# Altium PCB M1.PcbDoc
Units mil, origin at the board's own origin, x right, y up, seen from the top; angles counter-clockwise.
Board outline 3706.72 x 2266.13 mil, 2 copper layers (Top Layer, Bottom Layer); 8 components, 76 nets, 233 pads, 79 vias.
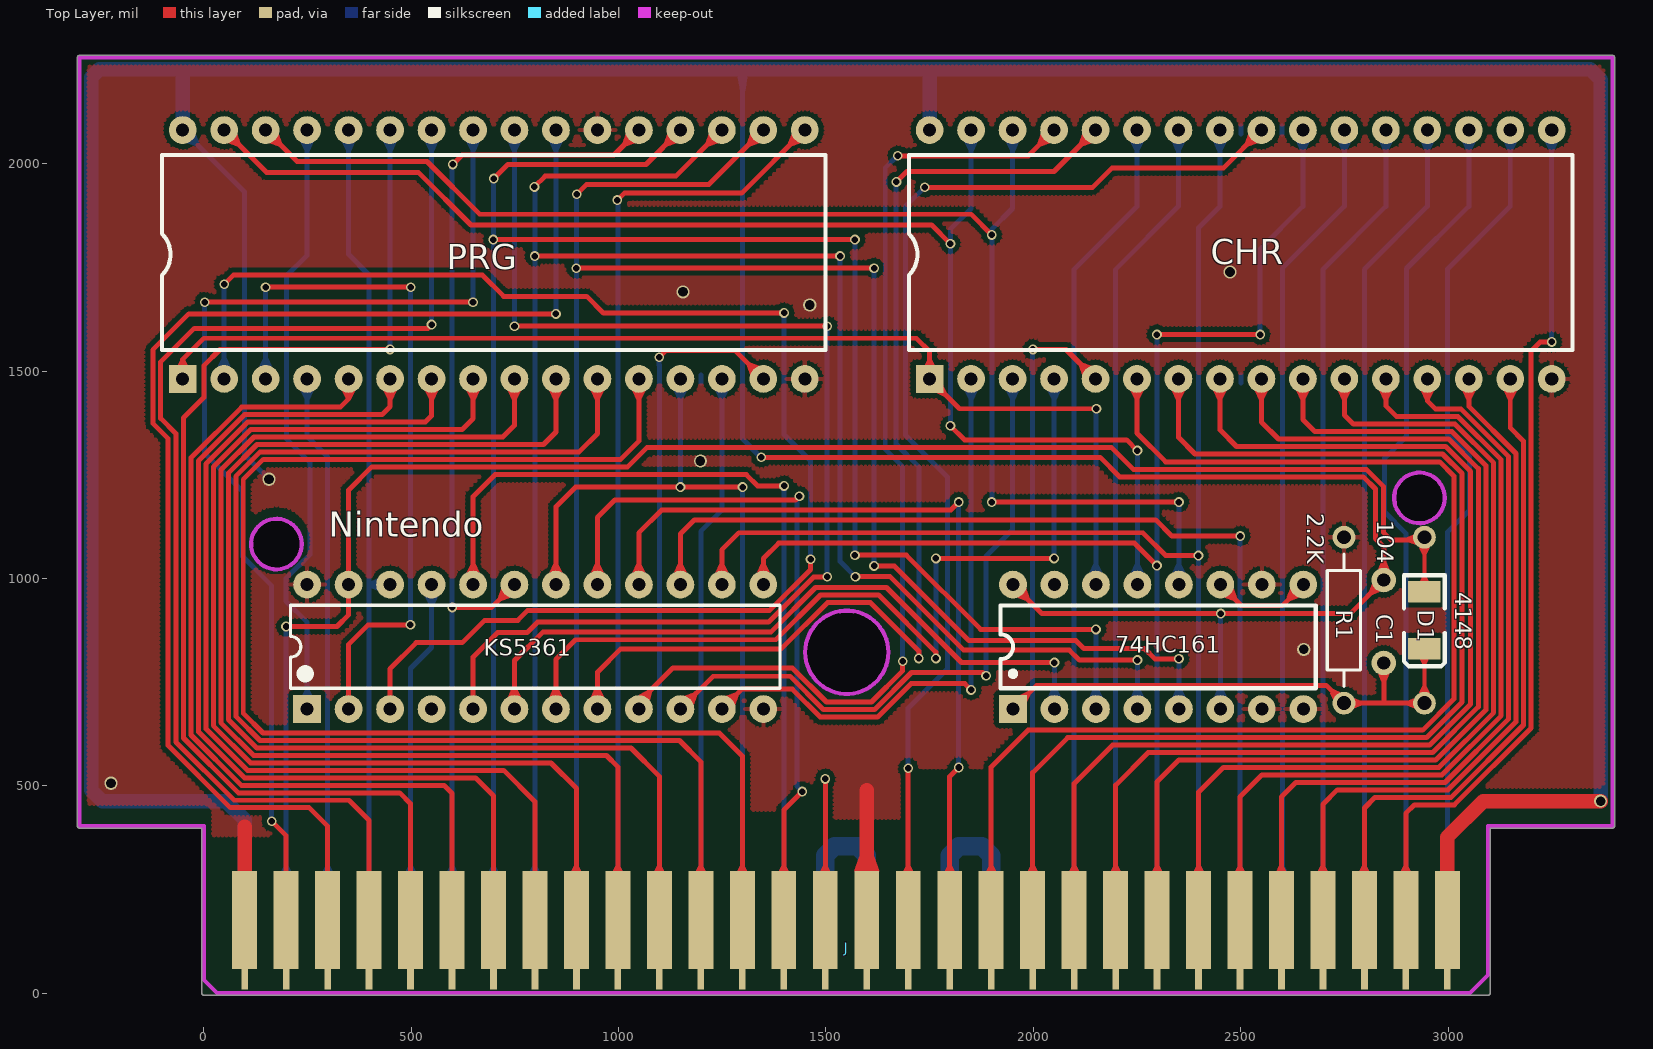
[diagram p0: Top Layer view]
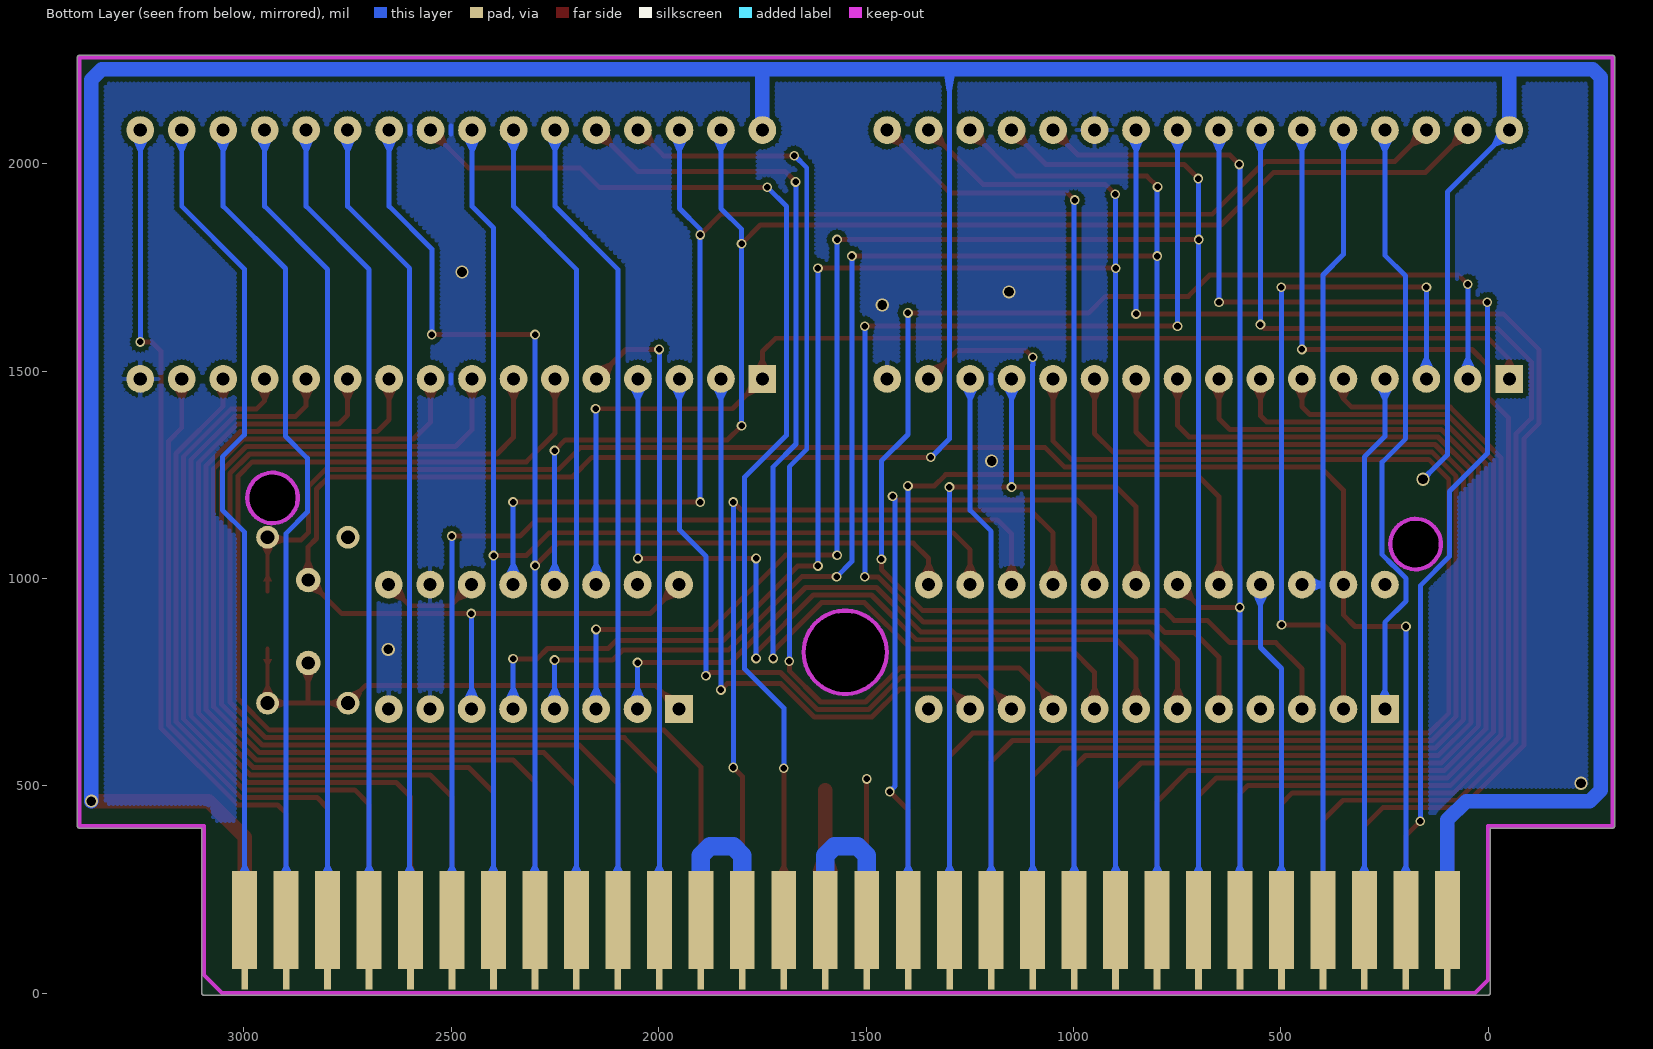
[diagram p1: Bottom Layer view, seen from below]
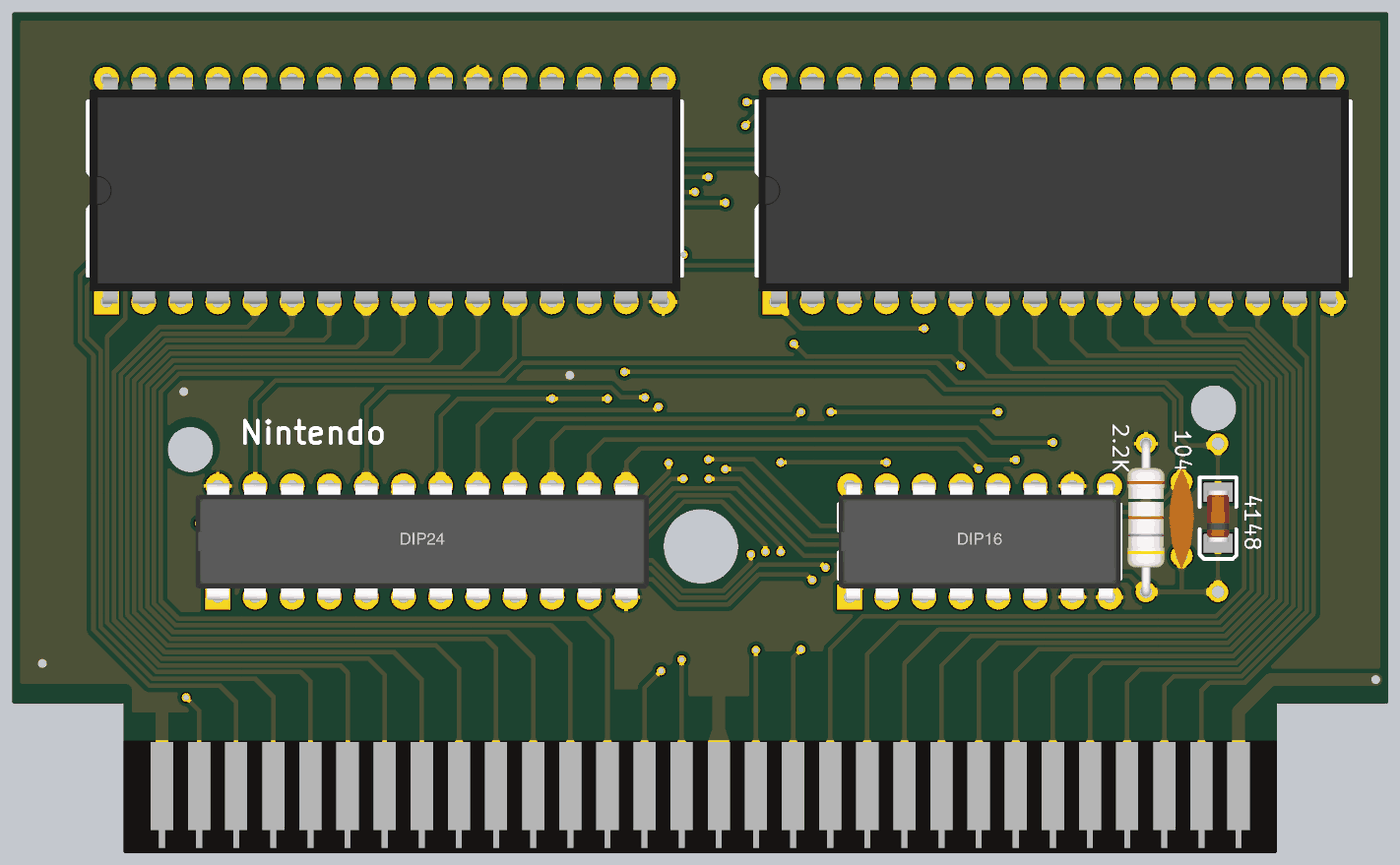
[diagram p2: 3D render of the assembled board from above, using the file's embedded part models]

## Layer stack, top to bottom
Top Solder: solder mask 0.4, Solder Resist, Dk 3.5
Top Layer: signal copper 1.4
Dielectric 1: dielectric 12.6, FR-4, Dk 4.8
Bottom Layer: signal copper 1.4
Bottom Solder: solder mask 0.4, Solder Resist, Dk 3.5

## Board outline
-300,397.94 cw(c-300,402.95) -305.02,402.95 -305.02,2256.1 cw(c-300,2256.1) -300,2261.12 3396.69,2261.12 cw(c3396.69,2256.1) 3401.71,2256.1 3401.71,402.95 cw(c3396.69,402.95) 3396.69,397.94 3101.71,397.94 3101.71,0 cw(c3096.69,0) 3096.69,-5.02 0,-5.02 cw(c0,0) -5.01,0 -5.01,397.94
cut-out: 175,1021.65 cw(c175,1082.68) 113.98,1082.68 cw(c175,1082.68) 175,1143.7 cw(c175,1082.68) 236.02,1082.68 cw(c175,1082.68)
cut-out: 1449.84,821.81 ccw(c1550.24,821.81) 1550.24,721.42 ccw(c1550.24,821.81) 1650.63,821.81 ccw(c1550.24,821.81) 1550.24,922.2 ccw(c1550.24,821.81)
cut-out: 2870.04,1194.02 ccw(c2931.06,1194.02) 2931.06,1132.99 ccw(c2931.06,1194.02) 2992.09,1194.02 ccw(c2931.06,1194.02) 2931.06,1255.04 ccw(c2931.06,1194.02)

## Design rules (kind name [scope] priority, off if disabled: settings)
Clearance [All] p1: gap=6 ignorepadtopadclearanceinfootprint=FALSE except(12: Arc-Poly Track-Poly SMDPad-Poly THPad-Poly Via-Poly Fill-Poly Poly-Poly)
HoleSize [All] p1: absolutevalues=TRUE maxlimit=250 minlimit=1 maxpercent=80.000 minpercent=20.000
HoleToHoleClearance [All] p1: gap=1 allowstackedmicrovias=TRUE
MinimumSolderMaskSliver [All] p1: minsoldermaskwidth=1
PolygonConnect PolygonConnect_1 [IsPad] p1: connectstyle=Relief reliefconductorwidth=10 reliefentries=4 polygonreliefangle="90 Angle" airgapwidth=10
PolygonConnect [All] p2: connectstyle=Direct reliefconductorwidth=10 reliefentries=4 polygonreliefangle="90 Angle" airgapwidth=10
RoutingVias [All] p1: holewidth=15.75 width=23.62 viastyle="Through Hole" minholewidth=15.75 minwidth=23.62 maxholewidth=216.54 maxwidth=236.22
SilkToSilkClearance [All] p1: silktosilkclearance=0
SilkToSolderMaskClearance [IsPad] p1: minsilkscreentomaskgap=0 clearancetoexposedcopper=TRUE
SolderMaskExpansion [All] p1: expansion=4
Width [All] p1: maxlimit=50 minlimit=6 preferedwidth=12
25 further rules are at their usual default settings.

## Classes and differential pairs
component class M1HK: 74HC161 C1 CHR D1 J PRG R1

## Components (designator, comment, footprint, x,y, rotation, side; value= is the part's Value field where it differs from the comment)
74HC161 "74LS161" DIP16 2301,835 r90 top locked (schematic designator U6)
C1 "104" RAD-0.2 2845,796 r90 top
CHR "27C801" DIP32 2500,1781 r90 top locked (schematic designator U2)
D1 "4148" 4148 2943,968 r270 top
J "60P" 60P-3(J)(L) 1548.39,175.98 r0 top locked
KS5361 "AX5904" DIP24 799,835 r90 top (schematic designator U3)
PRG "27C801" DIP32 699,1781 r90 top locked (schematic designator U1)
R1 "2.2K" AXIAL0.4 2789,569.06 r90 top

## Footprints (in the part's own frame and the unit in brackets; to place one, negate y for a bottom-side part, rotate by r counter-clockwise, add the part's x,y. Pads: shape width x height; smd on the part's side, far side on the other; paste and mask are expansions set on the pad)
60P-3(J)(L) [mil]
  rect 16.06x65 smd: 1(-1450,-134.4) 1(-1450,-134.4) 2(-1350,-134.4) 3(-1250,-134.4) 4(-1150,-134.4) 5(-1050,-134.4) 6(-950,-134.4) 7(-850,-134.4) 8(-750,-134.4) 9(-650,-134.4) 10(-550,-134.4) 11(-450,-134.4) 12(-350,-134.4) 13(-250,-134.4) 14(-150,-134.4) 15(-50,-134.4) 16(50,-134.4) 17(150,-134.4) 18(250,-134.4) 19(350,-134.4) 20(450,-134.4) 21(550,-134.4) 22(650,-134.4) 23(750,-134.4) 24(850,-134.4) 25(950,-134.4) 26(1050,-134.4) 27(1150,-134.4) 28(1250,-134.4) 29(1350,-134.4) 30(1450,-134.4)
  rect 60x236.22 smd: 1(-1450,0) 2(-1350,0) 3(-1250,0) 4(-1150,0) 5(-1050,0) 6(-950,0) 7(-850,0) 8(-750,0) 9(-650,0) 10(-550,0) 11(-450,0) 12(-350,0) 13(-250,0) 14(-150,0) 15(-50,0) 16(50,0) 17(150,0) 18(250,0) 19(350,0) 20(450,0) 21(550,0) 22(650,0) 23(750,0) 24(850,0) 25(950,0) 26(1050,0) 27(1150,0) 28(1250,0) 29(1350,0) 30(1450,0)
  rect 16.06x65 smd far side: 31(-1450,-134.4) 32(-1350,-134.4) 33(-1250,-134.4) 34(-1150,-134.4) 35(-1050,-134.4) 36(-950,-134.4) 37(-850,-134.4) 38(-750,-134.4) 39(-650,-134.4) 40(-550,-134.4) 41(-450,-134.4) 42(-350,-134.4) 43(-250,-134.4) 44(-150,-134.4) 45(-50,-134.4) 46(50,-134.4) 47(150,-134.4) 48(250,-134.4) 49(350,-134.4) 50(450,-134.4) 51(550,-134.4) 52(650,-134.4) 53(750,-134.4) 54(850,-134.4) 55(950,-134.4) 56(1050,-134.4) 57(1150,-134.4) 58(1250,-134.4) 59(1350,-134.4) 60(1450,-134.4)
  rect 60x236.22 smd far side: 31(-1450,0) 32(-1350,0) 33(-1250,0) 34(-1150,0) 35(-1050,0) 36(-950,0) 37(-850,0) 38(-750,0) 39(-650,0) 40(-550,0) 41(-450,0) 42(-350,0) 43(-250,0) 44(-150,0) 45(-50,0) 46(50,0) 47(150,0) 48(250,0) 49(350,0) 50(450,0) 51(550,0) 52(650,0) 53(750,0) 54(850,0) 55(950,0) 56(1050,0) 57(1150,0) 58(1250,0) 59(1350,0) 60(1450,0)
4148 [mm]
  round 1.4 hole 0.85: A(-3.329,0) K(6.831,0)
  rect 1.3x2 smd: A(0,0) K(3.5,0)
  Top Layer lines w0.254: 6.831,0 3.5,0 ; 0,0 -3.175,0 -3.329,0
  silkscreen extent -1,-1.25 4.57,1.25, body extent -0.1,-0.75 3.4,0.75, height 1.5
AXIAL0.4 [mm] "1/4W/1/2W"
  round 1.4 hole 0.85: 1(3.302,1.016) 2(13.462,1.016)
  silkscreen extent 4.32,0 12.45,2.03, body extent 3,-0.24 13.76,2.28, height 2.63
DIP16 [mm]
  rect 1.7x1.7 hole 0.8: 1(-3.81,8.89)
  round 1.7 hole 0.8: 2(-3.81,6.35) 3(-3.81,3.81) 4(-3.81,1.27) 5(-3.81,-1.27) 6(-3.81,-3.81) 7(-3.81,-6.35) 8(-3.81,-8.89) 9(3.81,-8.89) 10(3.81,-6.35) 11(3.81,-3.81) 12(3.81,-1.27) 13(3.81,1.27) 14(3.81,3.81) 15(3.81,6.35) 16(3.81,8.89)
  silkscreen extent -2.54,-9.65 2.54,9.65, body extent -4.02,-9.65 4.02,9.65, height 4.45
DIP24 [mm]
  rect 1.7x1.7 hole 0.8: 1(-3.81,13.97)
  round 1.7 hole 0.8: 2(-3.81,11.43) 3(-3.81,8.89) 4(-3.81,6.35) 5(-3.81,3.81) 6(-3.81,1.27) 7(-3.81,-1.27) 8(-3.81,-3.81) 9(-3.81,-6.35) 10(-3.81,-8.89) 11(-3.81,-11.43) 12(-3.81,-13.97) 13(3.81,-13.97) 14(3.81,-11.43) 15(3.81,-8.89) 16(3.81,-6.35) 17(3.81,-3.81) 18(3.81,-1.27) 19(3.81,1.27) 20(3.81,3.81) 21(3.81,6.35) 22(3.81,8.89) 23(3.81,11.43) 24(3.81,13.97)
  silkscreen extent -2.54,-14.99 2.54,14.99, body extent -4,-15.51 4,15.49, height 4.8
DIP32 [mm]
  rect 1.7x1.7 hole 0.8: 1(-7.62,19.05)
  round 1.7 hole 0.8: 2(-7.62,16.51) 3(-7.62,13.97) 4(-7.62,11.43) 5(-7.62,8.89) 6(-7.62,6.35) 7(-7.62,3.81) 8(-7.62,1.27) 9(-7.62,-1.27) 10(-7.62,-3.81) 11(-7.62,-6.35) 12(-7.62,-8.89) 13(-7.62,-11.43) 14(-7.62,-13.97) 15(-7.62,-16.51) 16(-7.62,-19.05) 17(7.62,-19.05) 18(7.62,-16.51) 19(7.62,-13.97) 20(7.62,-11.43) 21(7.62,-8.89) 22(7.62,-6.35) 23(7.62,-3.81) 24(7.62,-1.27) 25(7.62,1.27) 26(7.62,3.81) 27(7.62,6.35) 28(7.62,8.89) 29(7.62,11.43) 30(7.62,13.97) 31(7.62,16.51) 32(7.62,19.05)
  silkscreen extent -5.84,-20.32 6.1,20.32, body extent -7.75,-20.21 7.75,20.19, height 5
RAD-0.2 [mm]
  round 1.5 hole 0.8: 1(0,0) 2(5.08,0)
  body extent -0.96,-0.85 6.04,0.85, height 7.06

## Part data
74HC161: "BCD十进制计数器/ 4位二进制计数器"
C1: library part CAP, "无极性电容"
CHR PRG: "8兆位1M ×8紫外线可擦除CMOS EPROM"
D1: library part 1n4148
J: "金手指"
KS5361: "MMC1"
R1: library part RES

## Via types
v1: diameter 23.62, hole 15.75, Top Layer to Bottom Layer, 71 vias
v2: diameter 31.5, hole 23.62, Top Layer to Bottom Layer, tented both sides, 8 vias

## Nets (pads, with @x,y where several pads share a name; then routed paths per layer and width w, separated by ;. In a path a pad name is that pad's centre, name@x,y a point inside that pad or via, vN(x,y) a via of type N, cw(c..) or ccw(c..) an arc to the next point about the centre after c; other vN are vias at no path point)
"CHR A12": CHR.4 KS5361.7 | length 2131.4
  Top Layer w12: KS5361.7 849,805 896,852 1379,852 1487,960 1627,960 1765,822 v1(1765,807) ; v1(1765,1048) v1(2050,1048)
  Bottom Layer w12: v1(1765,807) v1(1765,1048) ; v1(2050,1048) CHR.4
"CHR A13": CHR.28 KS5361.8 | length 2703.6
  Top Layer w12: KS5361.8 949,774 1005,830 1392,830 1504,942 1607,942 1724,825 v1(1724,807) ; v1(1670,1956) 1695,1981 2050,1981 CHR.28
  Bottom Layer w12: v1@1669,1956 1669,1324 1724,1269 v1(1724,807)
"CHR A14": CHR.29 KS5361.9 | length 2426.9
  Top Layer w12: KS5361.9 1049,702 1131,784 1419,784 1501.13,701.87 1609.87,701.87 1685,777 v1(1685,800) ; v1(1673,2019) 1988,2019 CHR.29
  Bottom Layer w12: v1@1672.5,2019.5 1643,1990 1643,1311 1685,1269 v1(1685,800)
"CHR A15": CHR.3 KS5361.10 | length 1585.7
  Top Layer w12: KS5361.10 1228,764 1413.54,764 1493.67,683.87 1617.33,683.87 1706.46,773 1878,773 v1(1886,765)
  Bottom Layer w12: v1(1886,765) 1886,1053 1950,1117 CHR.3
"CHR A16": CHR.2 KS5361.11 | length 1438.1
  Top Layer w12: KS5361.11 1297,733 1419.09,733 1486.22,665.87 1624.78,665.87 1704.91,746 1835,746 v1(1850,731)
  Bottom Layer w12: v1(1850,731) CHR.2
"CIRAM A10": J.18 KS5361.16 | length 1943.6
  Top Layer w12: KS5361.16 1049,1110 1104,1165 1801,1165 v1(1820,1184) ; J.18@1798.39,175.98 1798.39,522.39 v1(1820,544)
  Bottom Layer w12: v1(1820,544) v1(1820,1184)
"CPU A0": J.13 PRG.12 | length 3348
  Top Layer w12: PRG.12 1049,1331 1005,1287 143.19,1287 95,1238.81 95,674.65 142.65,627 1243,627 1298.39,571.61 J.13@1298.39,175.98
"CPU A1": J.12 PRG.11 | length 3174
  Top Layer w12: PRG.11 949,1349 905,1305 135.73,1305 77,1246.27 77,667.19 135.19,609 1147,609 1198.39,557.61 J.12@1198.39,175.98
"CPU A2": J.11 PRG.10 | length 2995.9
  Top Layer w12: PRG.10 849,1353 819,1323 128.28,1323 59,1253.72 59,659.73 127.73,591 1030,591 1098.39,522.61 J.11@1098.39,175.98
"CPU A3": J.10 PRG.9 | length 2844.8
  Top Layer w12: PRG.9 749,1369 721,1341 120.82,1341 41,1261.18 41,652.28 120.28,573 971,573 998.39,545.61 J.10@998.39,175.98
"CPU A4": J.9 PRG.8 | length 2649.7
  Top Layer w12: PRG.8 649,1385 623,1359 113.37,1359 23,1268.63 23,644.82 112.82,555 837,555 898.39,493.61 J.9@898.39,175.98
"CPU A5": J.8 PRG.7 | length 2471.5
  Top Layer w12: PRG.7 549,1392 534,1377 105.91,1377 5,1276.09 5,637.37 105.37,537 723,537 798.39,461.61 J.8@798.39,175.98
"CPU A6": J.7 PRG.6 | length 2311.6
  Top Layer w12: PRG.6 449,1414 430,1395 98.46,1395 -13,1283.54 -13,629.91 97.91,519 655,519 698.39,475.61 J.7@698.39,175.98
"CPU A7": J.6 PRG.5 | length 2148.7
  Top Layer w12: PRG.5 349,1433 329,1413 91,1413 -31,1291 -31,622.46 90.46,501 579,501 598.39,481.61 J.6@598.39,175.98
"CPU A8": J.5 PRG.27 | length 2806.1
  Top Layer w12: v1(449,1552) 39,1552 0,1513 0,1436 -49,1387 -49,615 83,483 472,483 498.39,456.61 J.5@498.39,175.98
  Bottom Layer w12: v1(449,1552) PRG.27
"CPU A9": J.4 PRG.26 | length 2875.7
  Top Layer w12: J.4@398.39,175.98 398.39,416.61 350,465 73,465 -67,605 -67,1349 -104,1386 -104,1522 -23,1603 540,1603 v1(549,1612)
  Bottom Layer w12: v1(549,1612) PRG.26
"CPU A10": J.3 PRG.23 | length 3112
  Top Layer w12: J.3@298.39,175.98 298.39,402.61 254,447 64,447 -86,597 -86,1337 -123,1374 -123,1551 -36.22,1637.78 v1(849,1637.78)
  Bottom Layer w12: v1(849,1637.78) PRG.23
"CPU A11": J.2 PRG.25 | length 2633.4
  Top Layer w12: v1(2,1666) v1(649,1666) ; v1(163.5,414.5) 198.39,379.61 J.2@198.39,175.98
  Bottom Layer w12: v1(2,1666) 2,1301 93,1210 93,1053 163.5,982.5 v1(163.5,414.5) ; v1(649,1666) PRG.25
"CPU A12": J.33 PRG.4 | length 1325.5
  Bottom Layer w12: PRG.4 249,1342 298.39,1292.61 J.33@298.39,175.98
"CPU A13": J.34 KS5361.22 PRG.28 | length 1976.1
  Bottom Layer w12: PRG.28 349,1781 398.39,1731.61 398.39,985 ; J.34@398.39,175.98 398.39,985 ; KS5361.22 398.39,985
"CPU A14": J.35 KS5361.21 | length 830
  Bottom Layer w12: J.35@498.39,175.98 498.39,782.61 549,833.23 KS5361.21
"CPU A15": 
"CPU A16": 
"CPU D0": J.43 KS5361.18 PRG.13 | length 1962.5
  Top Layer w12: KS5361.18 849,1173 896,1220 v1(1149,1220) v1(1299,1220)
  Bottom Layer w12: v1(1149,1220) PRG.13 ; J.43@1298.39,175.98 v1@1298.39,1220
"CPU D1": J.42 PRG.14 | length 1326
  Bottom Layer w12: J.42@1198.39,175.98 1198.39,1113.39 1249,1164 PRG.14
"CPU D2": J.41 PRG.15 | length 1643.8
  Top Layer w12: v1(1098,1533) 1115,1550 1280,1550 PRG.15
  Bottom Layer w12: v1(1098,1533) 1098,1514.39 1098.39,1514 J.41@1098.39,175.98
"CPU D3": J.40 PRG.17 | length 2258
  Top Layer w12: v1(997,1912) 1014,1929 1297,1929 PRG.17
  Bottom Layer w12: J.40@998.39,175.98 v1@998.39,1912
"CPU D4": 74HC161.5 J.39 PRG.18 | length 4649.3
  Top Layer w12: v1(898,1748) v1(1616,1748) ; v1(899,1926) 923,1950 1218,1950 PRG.18 ; v1(1616,1030) 1665,1030 1845,850 2103,850 2122,831 2268,831 2293,806 v1(2351,806)
  Bottom Layer w12: J.39@898.39,175.98 898.39,1895.39 899,1896 v1(899,1926) ; v1(1616,1030) v1(1616,1748) ; 74HC161.5 v1(2351,806)
"CPU D5": 74HC161.4 J.38 PRG.19 | length 4682.9
  Top Layer w12: v1(797,1944) 823,1970 1138,1970 PRG.19 ; v1(798,1777) v1(1534,1777) ; v1(1571,1004) 1655,1004 1832,827 2087,827 2111,803 v1(2251,803)
  Bottom Layer w12: v1(797,1944) 798.39,1942.61 J.38@798.39,175.98 ; v1(1534,1777) 1534,1041 v1(1571,1004) ; 74HC161.4 v1(2251,803)
"CPU D6": 74HC161.3 J.37 PRG.20 | length 4766.6
  Top Layer w12: v1(698,1817) v1(1570,1817) ; v1(699,1964) 733,1998 1066,1998 PRG.20 ; v1(1570,1056) 1694,1056 1873,877 v1(2151,877)
  Bottom Layer w12: J.37@698.39,175.98 v1@698.39,1964 ; v1(1570,1056) v1(1570,1817) ; 74HC161.3 v1(2151,877)
"CPU D7": J.36 KS5361.19 PRG.21 | length 2478.8
  Top Layer w12: v1(599,930) 694,930 KS5361.19 ; v1(600,1998) 623,2021 989,2021 PRG.21
  Bottom Layer w12: J.36@598.39,175.98 598.39,1996.39 v1(600,1998)
CPU-R/W: J.14 KS5361.17 | length 1718.6
  Top Layer w12: KS5361.17 949,1147 991,1189 1427,1189 v1(1436,1198) ; J.14@1398.39,175.98 1398.39,441.39 v1(1443,486)
  Bottom Layer w12: v1@1436.2,1198 1430,1191.8 1430,499 v1(1443,486)
GND: 74HC161.7 74HC161.8 74HC161.10 CHR.16 J.1 J.16 KS5361.12 PRG.16 PRG.22 R1.2 | length 627.1
  Top Layer w12: KS5361.12 KS5361.12@1360,685
  Top Layer w35: J.1@98.39,175.98 98.39,401 ; J.16@1598.39,175.98 1598.39,489
  Bottom Layer w12: 1198.73,1471.11 1198.73,1490.36 ; 2500.27,1471.11 2500.27,1490.89 ; 2500.27,2071.11 2500.27,2090.89 ; 2599.73,2071.11 2599.73,2090.36
  other v2: -224,506 2652,829 1197,1283 1461,1659 1155,1691 2474,1739
M2: D1.A J.32 KS5361.23 | length 3965.3
  Top Layer w12: v1(198.39,884) 321,884 349,912 KS5361.23 349,1213 405,1269 1022,1269 1069,1316 2188,1316 2241,1263 2803,1263 2844,1222 2844,1111 2862,1093 D1.A@2943,1093
  Bottom Layer w12: J.32@198.39,175.98 v1(198.39,884)
NetC1_1: 74HC161.1 C1.1 D1.K R1.1 | length 1130.7
  Top Layer w12: 74HC161.1 2008,742 2706.06,742 R1.1 2844,699.06 ; C1.1 2845,700.06 2844,699.06 ; D1.K@2943,699.06 2844,699.06
NetJ_45: J.45 J.46 | length 430
  Bottom Layer w45: J.45@1498.39,175.98 1498.39,331.83 1520.54,353.98 1576.23,353.98 1598.39,331.83 J.46@1598.39,175.98
NetJ_48: J.48 J.49 | length 430
  Bottom Layer w45: J.48@1798.39,175.98 1798.39,331.83 1820.54,353.98 1876.23,353.98 1898.39,331.83 J.49@1898.39,175.98
NetU4_4: 
NetU4_10: 
NetU6_9: 74HC161.9 74HC161.11 | length 242.2
  Top Layer w12: 74HC161.11 2502,934 2600,934 74HC161.9
"PPU A0": CHR.12 J.25 | length 2022
  Top Layer w12: J.25@2498.38,176 2498.38,473.38 2551,526 2985.18,526 3128,668.82 3128,1286.09 3024.09,1390 2876,1390 2850,1416 CHR.12
"PPU A1": CHR.11 J.24 | length 2196.6
  Top Layer w12: J.24@2398.38,176 2398.38,484.38 2458,544 2977.72,544 3110,676.28 3110,1278.63 3016.63,1372 2772,1372 2750,1394 CHR.11
"PPU A2": CHR.10 J.23 | length 2372.2
  Top Layer w12: J.23@2298.38,176 2298.38,509.38 2351,562 2970.27,562 3091,682.73 3091,1272.18 3009.18,1354 2679,1354 2650,1383 CHR.10
"PPU A3": CHR.9 J.22 | length 2526.2
  Top Layer w12: J.22@2198.38,176 2198.38,501.38 2277,580 2962.81,580 3073,690.19 3073,1264.72 3001.72,1336 2591,1336 2550,1377 CHR.9
"PPU A4": CHR.8 J.21 | length 2694.2
  Top Layer w12: J.21@2098.38,176 2098.38,505.38 2191,598 2955.35,598 3054,696.65 3054,1258.27 2994.27,1318 2490,1318 2450,1358 CHR.8
"PPU A5": CHR.7 J.20 | length 2873.5
  Top Layer w12: J.20@1998.38,176 1998.38,531.38 2083,616 2947.9,616 3034,702.1 3034,1252.81 2986.81,1300 2390,1300 2350,1340 CHR.7
"PPU A6": CHR.6 J.19 | length 3028.5
  Top Layer w12: J.19@1898.39,175.98 1898.39,545.39 1987,634 2939,634 3014,709 3014,1247 2980,1281 2319,1281 2250,1350 CHR.6
"PPU A7": CHR.5 J.50 | length 1556.4
  Top Layer w12: v1(1999,1552) 2079,1552 CHR.5
  Bottom Layer w12: J.50@1998.39,175.98 v1@1998.39,1552
"PPU A8": CHR.27 J.51 | length 1967.8
  Bottom Layer w12: J.51@2098.39,175.98 2098.39,1745.39 2250,1897 CHR.27
"PPU A9": CHR.26 J.52 | length 1967.8
  Bottom Layer w12: J.52@2198.39,175.98 2198.39,1745.39 2350,1897 CHR.26
"PPU A10": CHR.23 J.53 KS5361.13 | length 3246.4
  Top Layer w12: KS5361.13 1349,1048 1386,1085 2244,1085 v1(2298,1031) ; v1(2298,1588) v1(2547,1588)
  Bottom Layer w12: v1(2298,1031) v1(2298,1588) ; J.53@2298.39,175.98 v1@2298.39,1031 ; v1(2547,1588) 2547,1794 2650,1897 CHR.23
"PPU A11": CHR.25 J.54 KS5361.14 | length 3199.2
  Top Layer w12: KS5361.14 1249,1069 1290,1110 2264,1110 2319,1055 v1(2398,1055)
  Bottom Layer w12: J.54@2398.39,175.98 2398.39,1845.39 2450,1897 CHR.25
"PPU A12": J.55 KS5361.15 | length 2428.3
  Top Layer w12: KS5361.15 1149,1107 1183,1141 2295,1141 2334,1102 v1(2499,1102)
  Bottom Layer w12: J.55@2498.39,175.98 v1@2498.39,1102
"PPU A13": CHR.22 J.56 | length 1967.8
  Bottom Layer w12: J.56@2598.39,175.98 2600.46,178.06 2600.46,1747.46 2750,1897 CHR.22
"PPU A14": 
"PPU A15": 
"PPU A16": 
"PPU D0": CHR.13 J.26 | length 1859.7
  Top Layer w12: J.26@2598.38,176 2598.38,473.38 2633,508 2992.63,508 3146,661.37 3146,1293.54 3031.54,1408 2970,1408 2950,1428 CHR.13
"PPU D1": CHR.14 J.27 | length 1701.5
  Top Layer w12: J.27@2698.38,176 2698.38,455.38 2733,490 3000.09,490 3164,653.91 3164,1301 3050,1415 CHR.14
"PPU D2": CHR.15 J.28 | length 1584.7
  Top Layer w12: J.28@2798.38,176 2798.38,446.38 2824,472 3007.54,472 3182,646.46 3182,1330.81 3150,1362.81 CHR.15
"PPU D3": CHR.17 J.29 | length 2123.3
  Top Layer w12: J.29@2898.38,176 2898.38,433.38 2919,454 3015,454 3200,639 3200,1548 3222,1570 v1(3250,1570)
  Bottom Layer w12: v1(3250,1570) CHR.17
"PPU D4": CHR.18 J.60 | length 2011.7
  Bottom Layer w12: J.60@2998.39,175.98 2998.39,1111.39 3052,1165 3052,1293 2999,1346 2999,1746 3150,1897 CHR.18
"PPU D5": CHR.19 J.59 | length 2010.4
  Bottom Layer w12: J.59@2898.39,175.98 2898.39,1108.61 2847,1160 2847,1290 2900,1343 2900,1747 3050,1897 CHR.19
"PPU D6": CHR.20 J.58 | length 1967.8
  Bottom Layer w12: J.58@2798.39,175.98 2798.39,1745.39 2950,1897 CHR.20
"PPU D7": CHR.21 J.57 | length 1967.8
  Bottom Layer w12: J.57@2698.39,175.98 2698.39,1745.39 2850,1897 CHR.21
PPU-OE: CHR.24 J.17 | length 2736.3
  Top Layer w12: J.17@1698.39,175.98 v1(1698.39,542) ; v1(1738,1943) 2143,1943 2190,1990 2459,1990 CHR.24
  Bottom Layer w12: v1(1698.39,542) 1698.39,687.39 1793,782 1793,1244 1692,1345 1692,1897 v1(1738,1943)
"PRG A14": KS5361.1 PRG.29 | length 1485.5
  Bottom Layer w12: KS5361.1 249,894 198,945 198,1000 228.92,1030.92 229.47,1030.92 255.68,1057.13 255.68,1280.32 199,1337 199,1729 249,1779 PRG.29
"PRG A15": KS5361.2 PRG.3 | length 1708.5
  Top Layer w12: v1(149,1702) v1(499,1702) ; KS5361.2 349,841 396,888 v1@497,888
  Bottom Layer w12: PRG.3 v1(149,1702) ; v1(498,888) v1@498,1702
"PRG A16": KS5361.3 PRG.2 | length 3480
  Top Layer w12: v1(49,1709) 71,1731 672,1731 723,1680 923,1680 963,1640 v1(1399,1640) ; KS5361.3 449,782 512,845 623,845 677,899 757,899 780,922 1363.54,922 1463,1021.46 v1(1463,1046)
  Bottom Layer w12: PRG.2 v1(49,1709) ; v1(1399,1640) 1399,1347 1463,1283 v1(1463,1046)
"PRG A17": 74HC161.12 CHR.30 PRG.30 | length 3423.5
  Top Layer w12: PRG.30 225,2005 538,2005 665,1878 1850,1878 v1(1900,1828) ; v1(1900,1184) v1(2351,1184)
  Bottom Layer w12: v1(1900,1184) v1(1900,1828) 1900,1842 1950,1892 CHR.30 ; 74HC161.12 v1(2351,1184)
"PRG A18": 74HC161.13 CHR.31 PRG.31 | length 3411.1
  Top Layer w12: PRG.31 151,1979 517,1979 644,1852 1755,1852 v1(1800,1807) ; v1(1800,1368) 1834,1334 2225,1334 v1(2251,1308) ; CHR.31@1850,2067 CHR.31
  Bottom Layer w12: v1(1800,1368) v1(1800,1807) 1800,1842 1850,1892 CHR.31 ; 74HC161.13 v1(2251,1308)
"PRG A19": 74HC161.14 CHR.1 PRG.1 | length 2816.2
  Top Layer w12: PRG.1 -51,1528 0,1579 1718,1579 1750,1547 CHR.1 1822,1409 v1(2152,1409) ; 74HC161.14@2148,1011 74HC161.14@2160,1011
  Bottom Layer w12: 74HC161.14 v1@2151,1409
"PRG CE": KS5361.5 PRG.24 | length 2889.9
  Top Layer w12: KS5361.5 649,810 708,869 779,869 805,895 1362,895 1470,1003 v1@1503,1003 ; v1(749,1608) v1(1503,1608)
  Bottom Layer w12: v1(749,1608) PRG.24 ; v1(1503,1004) v1(1503,1608)
ROM: J.44 KS5361.20 | length 2042.2
  Top Layer w12: KS5361.20 649,1197 702,1250 1308,1250 1335,1223 v1(1399,1223)
  Bottom Layer w12: J.44@1398.39,175.98 v1@1398.39,1223
VCC: 74HC161.6 74HC161.16 C1.2 CHR.32 J.30 J.31 KS5361.24 PRG.32 | length 13465.5
  Top Layer w12: v1(1344,1292) 2161,1292 2208,1245 2795.54,1245 2825,1215.54 2825,1096 2845,1076 C1.2 2764,915 v1(2452,915) 2021,915 74HC161.16
  Top Layer w35: J.30@2998.38,176 2998.38,376.32 3084.89,462.83 v2(3368,462.83)
  Bottom Layer w12: PRG.32 98,1932 98,1298 v2(157,1239) ; -51,2226.6 -50,2227.6 ; 1299,2227.6 1299,1336 v1@1343.5,1291.5 ; 74HC161.6 v1@2451,915
  Bottom Layer w35: PRG.32 -51,2226.6 ; J.31@98.38,176 98.38,417.62 53.17,462.83 -244.83,462.83 -271.5,489.5 -271.5,2208.5 -252.4,2227.6 -50,2227.6 1299,2227.6 3342.4,2227.6 3368.19,2201.81 v2@3368.19,463.02 ; CHR.32 1750,2226.6
"WAR CE": 74HC161.2 KS5361.6 | length 1678.9
  Top Layer w12: KS5361.6 749,802 818,871 1368,871 1475,978 1646,978 1827,797 v1(2051,797)
  Bottom Layer w12: 74HC161.2 v1(2051,797)
pads on no net: 74HC161.15 J.15 J.47 KS5361.4
copper on no net: | length 340.6
  Top Layer w12: 1498.39,175.98 v1(1498.39,516.61)

## Polygon pours and split planes (outlines as drawn)
GND on Top Layer "Top Layer-No Net" (hatched 90Degree grid 10 track 10, pour order 18): 349,985 349,1216 409,1276 416,1269 924,1269 924,1248 851,1175 851,987 849,985
GND on Top Layer "Top Layer-No Net" (hatched 90Degree grid 10 track 10, remove dead copper, pour order 12): 3109,438 3397,438 3407,448 3404,451 3404,2260 -298,2260 -304,2266 -304,431 -6.33,431 -3,434.33 -3,381 -2,382 0.39,379.61 198.39,379.61 163.5,414.5 249,500 249,685 2928.94,685 2943,699.06
GND on Top Layer "Top Layer-No Net" (hatched 90Degree grid 10 track 10, remove dead copper, pour order 2): 1249,685 1243,679 1243,627 1298.39,571.61 1298.39,459 1316,441.39 1398.39,441.39 1473.61,516.61 1498.39,516.61 1498.39,425 1500.39,423 1699,423 1699,541.39 1698.39,542 1700.39,544 1897,544 1987,634 2843,634 2843,1263 2245,1263 2199,1309 1041,1309 1009,1277 1014,1272 1014,1255 1305,1255 1337,1223 1399,1223 1424,1198 1436,1198 1436,1170 1465,1141 2289,1141 2289,1135 2264,1110 2311,1063 2390,1063 2398,1055 2351,1008 2351,985 2344,985 2244,1085 1386,1085 1349,1048 1349,985 1249,985
VCC on Top Layer "Top Layer-No Net" (hatched 90Degree grid 10 track 10, remove dead copper, pour order 0): 143.19,1287 161.19,1269 405,1269 405,896 349,840 349,685 256,685 200,629 136,629 101,664 101,1240 140,1279
GND on Bottom Layer "Top Layer-No Net" (hatched 90Degree grid 10 track 10, pour order 16): 1950,2081 2261,2081 2263,2079 2252,2068 2252,1899 2103,1750 2103,1479 1904,1479 1900,1475 1900,1828 1950,1903
GND on Bottom Layer "Top Layer-No Net" (hatched 90Degree grid 10 track 10, remove dead copper, pour order 14): -297,2249 -29,2249 -29,2103 -51,2081 77,1953 92,1953 92,1489 84,1481 4,1481 4,1324 -1,1319 79,1239 79,1079 156,1002 156,422 143.67,434.33 -290,434.33
GND on Bottom Layer "Top Layer-No Net" (hatched 90Degree grid 10 track 10, remove dead copper, pour order 8): 1291,2223 1746.4,2223 1750,2226.6 1761,2215.6 1761,1475 1255,1475 1249,1481
GND on Bottom Layer "Top Layer-No Net" (hatched 90Degree grid 10 track 10, remove dead copper, pour order 6): 2671.33,652.94 2700,681.61 2700,1481 2550,1481 2547,1484 2547,1794 2650,1897 2650,2081 3150,2081 3155,2076 3155,1902 2999,1746 2999,1346 3052,1293 3052,1165 2998.39,1111.39 2998.39,415 3098,415 3096,417 3096,437 3392,437 3393,436 3394,437 3394,2254 1744,2254 1738,2248 1750,2236 1750,2081 2450,2081 2450,1897 2446,1897 2398,1849 2398,981 2402,985 2398,667
GND on Bottom Layer "Top Layer-No Net" (hatched 90Degree grid 10 track 10, remove dead copper, pour order 4): 1099,975 1195,975 1197,973 1198.39,974.39 1198.39,1113.39 1249,1164 1249,1481 1298,1481 1299,1482 1299,2227.6 -50,2227.6 -51,2226.6 -51,2081 849,2081 849,1481 1100,1481

## Keep-outs
Keep-Out Layer:
  circle w10: c2931.06,1194.02 r61.02
  circle w10: c1550.24,821.81 r100.39
  circle w10: c175,1082.68 r61.02
  lines w10: -300,434.33 -300,2256.1 ; 3396.69,434.33 3396.69,2256.1 ; -300,2256.1 3396.69,2256.1 ; -300,2256.1 -300,402.95 0,402.95 ; -300,2256.1 3396.69,2256.1 ; 0,32 0,402.95 ; 0,32 32,0 ; 0,32 0,402.95 ; 0,32 32,0 ; 32,0 3053,0 ; 32,0 3053,0 ; 3053,0 3096.69,43.69 ; 3053,0 3096.69,43.69 ; 3096.69,43.69 3096.69,402.95 ; 3096.69,43.69 3096.69,402.95 ; 3096.69,402.95 3396.69,402.95 3396.69,2256.1

## Silkscreen, mask and mechanical layers (free items; w line width, h text height)
Top Overlay:
  text "Nintendo" at 301,1100 h60
Top Solder:
  rectangle: -286,-147 3381,299
Bottom Solder:
  rectangle: -286,-147 3381,299